# Altium PCB TimedCircuit.PcbDoc
Units mil, origin at the board's own origin, x right, y up, seen from the top; angles counter-clockwise.
Board outline 1130 x 715 mil, 2 copper layers (Top Layer, Bottom Layer); 9 components, 7 nets, 25 pads, 0 vias.
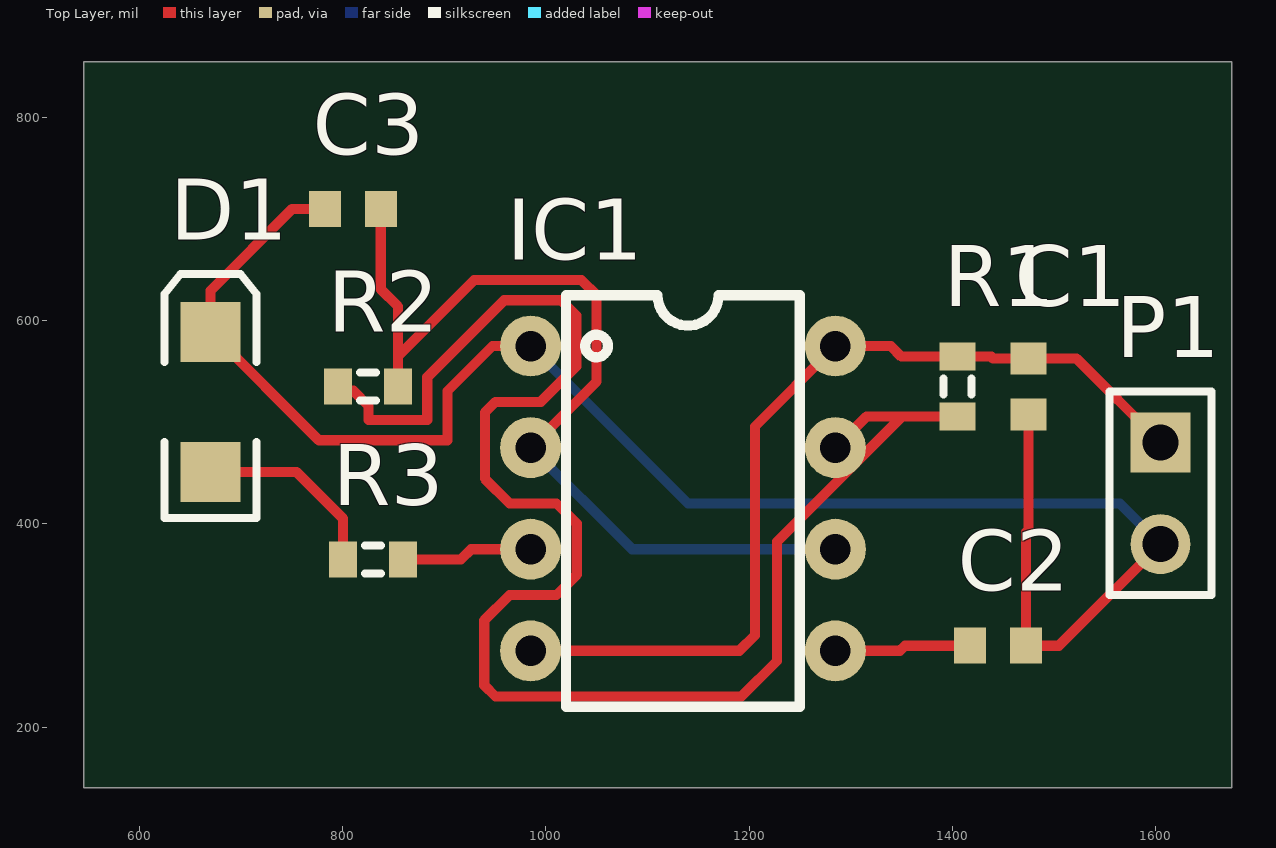
[diagram p0: Top Layer view]
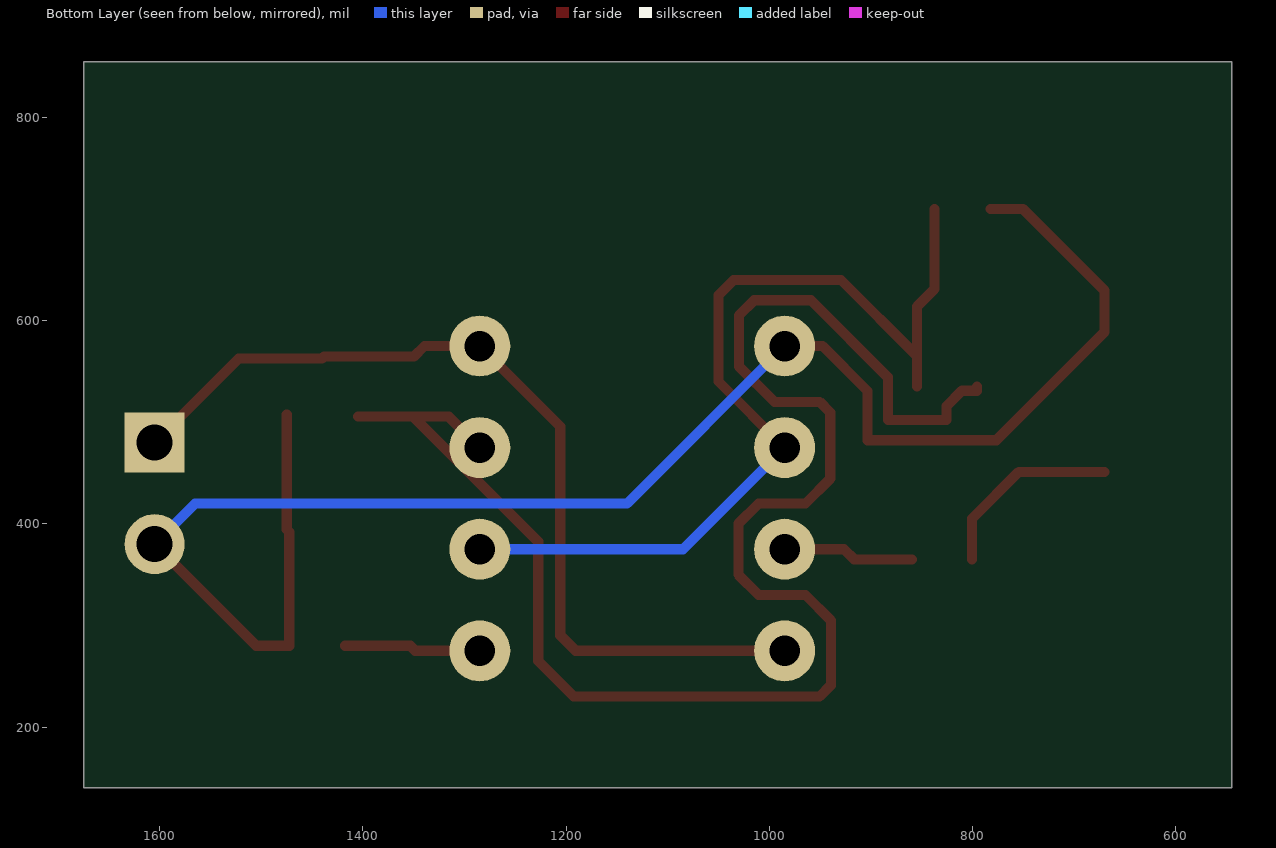
[diagram p1: Bottom Layer view, seen from below]

## Layer stack, top to bottom
Top Solder: solder mask 0.4, Solder Resist, Dk 3.5
Top Layer: signal copper 1.4
Dielectric 1: dielectric 12.6, FR-4, Dk 4.8
Bottom Layer: signal copper 1.4
Bottom Solder: solder mask 0.4, Solder Resist, Dk 3.5

## Board outline
545,140 545,855 1675,855 1675,140

## Design rules (kind name [scope] priority, off if disabled: settings)
Clearance [All] p1: gap=10
PolygonConnect [All] p1: connectstyle=Relief reliefconductorwidth=10 reliefentries=4 polygonreliefangle="90 Angle" airgapwidth=10
RoomDefinition TimedCircuit [InComponentClass('TimedCircuit')] p1: confinementstyle=ConfineIn formatcopy=TRUE lockcomponents=FALSE outline 540,140 1675,140 1675,855 540,855
RoutingVias [All] p1: holewidth=28 width=50 viastyle="Through Hole" minholewidth=28 minwidth=50 maxholewidth=28 maxwidth=50
SolderMaskExpansion [All] p1: expansion=4
Width [All] p1: maxlimit=10 minlimit=10 preferedwidth=10
29 further rules are at their usual default settings.

## Components (designator, comment, footprint, x,y, rotation, side; value= is the part's Value field where it differs from the comment)
C1 "Cap Semi" 1608[0603] 1475,535 r90 top
C2 "Cap Semi" 1608[0603] 1445,280 r180 top
C3 "Cap Semi" 1608[0603] 810,710 r0 top
D1 "LED2" 3.2X1.6X1.1 670,520 r90 top
IC1 "LM555-DIP" DIP-LM555 985,575 r270 top
P1 "Header 2" HDR1X2 1605,480 r270 top
R1 "Res3" J1-0603 1405,535 r90 top
R2 "Res3" J1-0603 825,535 r180 top
R3 "Res3" J1-0603 830,365 r0 top

## Footprints (in the part's own frame and the unit in brackets; to place one, negate y for a bottom-side part, rotate by r counter-clockwise, add the part's x,y. Pads: shape width x height; smd on the part's side, far side on the other; paste and mask are expansions set on the pad)
3.2X1.6X1.1 [mm] "SMT LED; 2 Flat Leads"
  rect 1.5x1.5 smd: 1(-1.75,0) 2(1.75,0)
  silkscreen extent -2.9,-1.15 3.2,1.15
1608[0603] [mm] "Chip Capacitor, Body 1.6x0.8mm, IPC High Density"
  rect 0.8x0.9 smd: 1(-0.7,0) 2(0.7,0)
  body extent -0.87,-0.48 0.87,0.48, height 1.3
DIP-LM555 [mil] "LM555 IC DIP"
  round 60 hole 30: 1(0,0) 1(0,0) 2(100,0) 3(200,0) 4(300,0) 5(300,300) 6(200,300) 7(100,300) 8(0,300)
  silkscreen extent -50,35 355,265, body extent -40,-50 360,350, height 344
HDR1X2 [mm] "Connector; Header; 2 Position"
  rect 1.5x1.5 hole 0.9: 1(0,0)
  round 1.5 hole 0.9: 2(2.54,0)
  silkscreen extent -1.27,-1.27 3.81,1.27
J1-0603 [mm] "Chip Resistor, Body 1.6x0.8mm, IPC High Density"
  rect 0.7x0.9 smd: 1(-0.75,0) 2(0.75,0)
  silkscreen extent -0.2,-0.35 0.2,0.35, body extent -0.85,-0.48 0.85,0.48, height 0.9

## Part data
C1 C2 C3: "Capacitor (Semiconductor SIM Model)"
D1: "Typical RED, GREEN, YELLOW, AMBER GaAs LED"
IC1: "LM555 DIP"
P1: "Header, 2-Pin"
R1 R2 R3: "Resistor"

## Nets (pads, with @x,y where several pads share a name; then routed paths per layer and width w, separated by ;. In a path a pad name is that pad's centre, name@x,y a point inside that pad or via, vN(x,y) a via of type N, cw(c..) or ccw(c..) an arc to the next point about the centre after c; other vN are vias at no path point)
GND: C1.1 C2.1 C3.1 D1.2 IC1.1 P1.2 | length 1715.4
  Top Layer w10: C3.1 750.47,710 670,629.53 D1.2 776.62,482.28 903.31,482.28 903.31,530.73 947.58,575 IC1.1@985,575 ; C1.1 1475,394.44 1472.56,392 C2.1 1505,280 P1.2
  Bottom Layer w10: IC1.1@985,575 1140,420 1565,420 P1.2
NetC2_2: C2.2 IC1.5 | length 134.5
  Top Layer w10: IC1.5 1348.47,275 1353.47,280 C2.2
NetC3_2: C3.2 IC1.2 IC1.6 R2.1 | length 933.1
  Top Layer w10: C3.2 837.56,630.97 854.53,614 854.53,565 ; R2.1 854.53,565 ; IC1.2 1050,540 1050,625 1035,640 929.53,640 854.53,565
  Bottom Layer w10: IC1.2 1085,375 IC1.6
NetD1_1: D1.1 R3.1 | length 189.6
  Top Layer w10: D1.1 754.37,451.1 800.47,405 R3.1
NetIC1_3: IC1.3 R3.2 | length 129.6
  Top Layer w10: R3.2 916.47,365 926.47,375 IC1.3
NetIC1_7: IC1.7 R1.1 R2.2 | length 1625.6
  Top Layer w10: R2.2 795.47,531 810.47,531 825.47,516 825.47,502.28 883.31,502.28 883.31,544.3 959.01,620 1015,620 1030,605 1030,555 995,520 950.47,520 940,509.53 940,444.47 964.47,420 1010.47,420 1030.47,400 1030.47,350 1010.47,330 964.47,330 939.47,305 939.47,241 950.47,230 1192.47,230 1227.47,265 1227.47,382.47 1350.47,505.47 ; IC1.7 1315.47,505.47 1350.47,505.47 ; R1.1 1350.47,505.47
VCC9: C1.2 IC1.4 IC1.8 P1.1 R1.2 | length 904
  Top Layer w10: IC1.4 1190.47,275 1205.84,290.37 1205.84,495.84 IC1.8 1339.47,575 1349.94,564.53 R1.2 1438.47,564.53 1440.44,562.56 C1.2 1522.44,562.56 P1.1